# EAGLE board Ultrasonics (EAGLE 9.4.2)
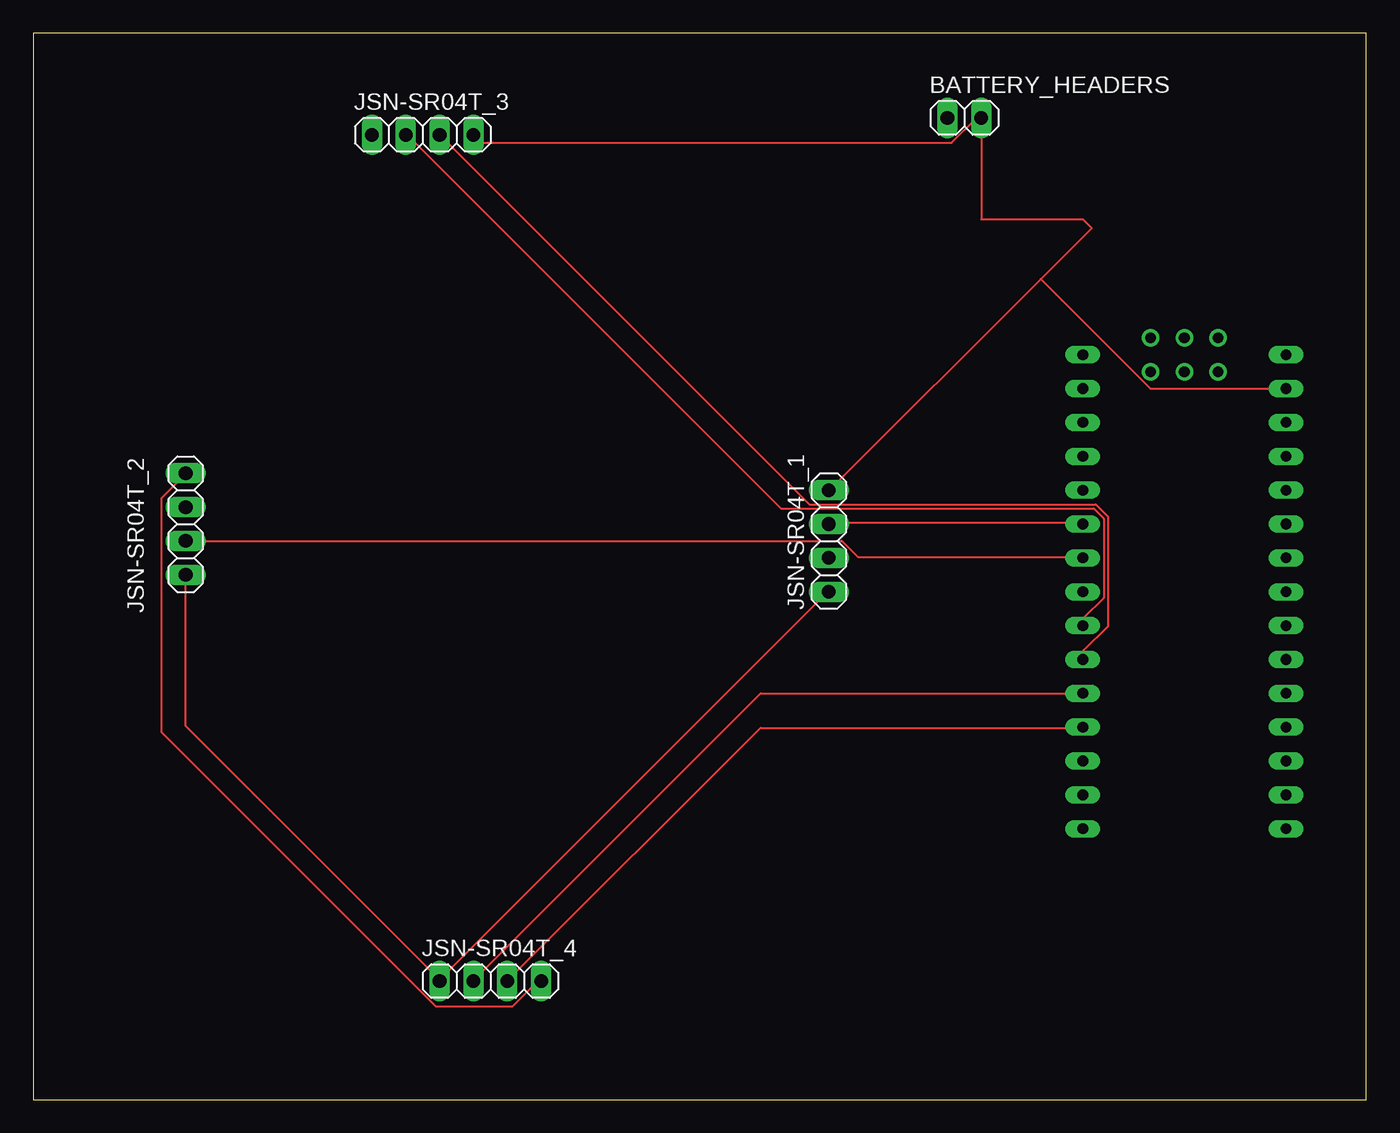
[diagram p0: board, top side]
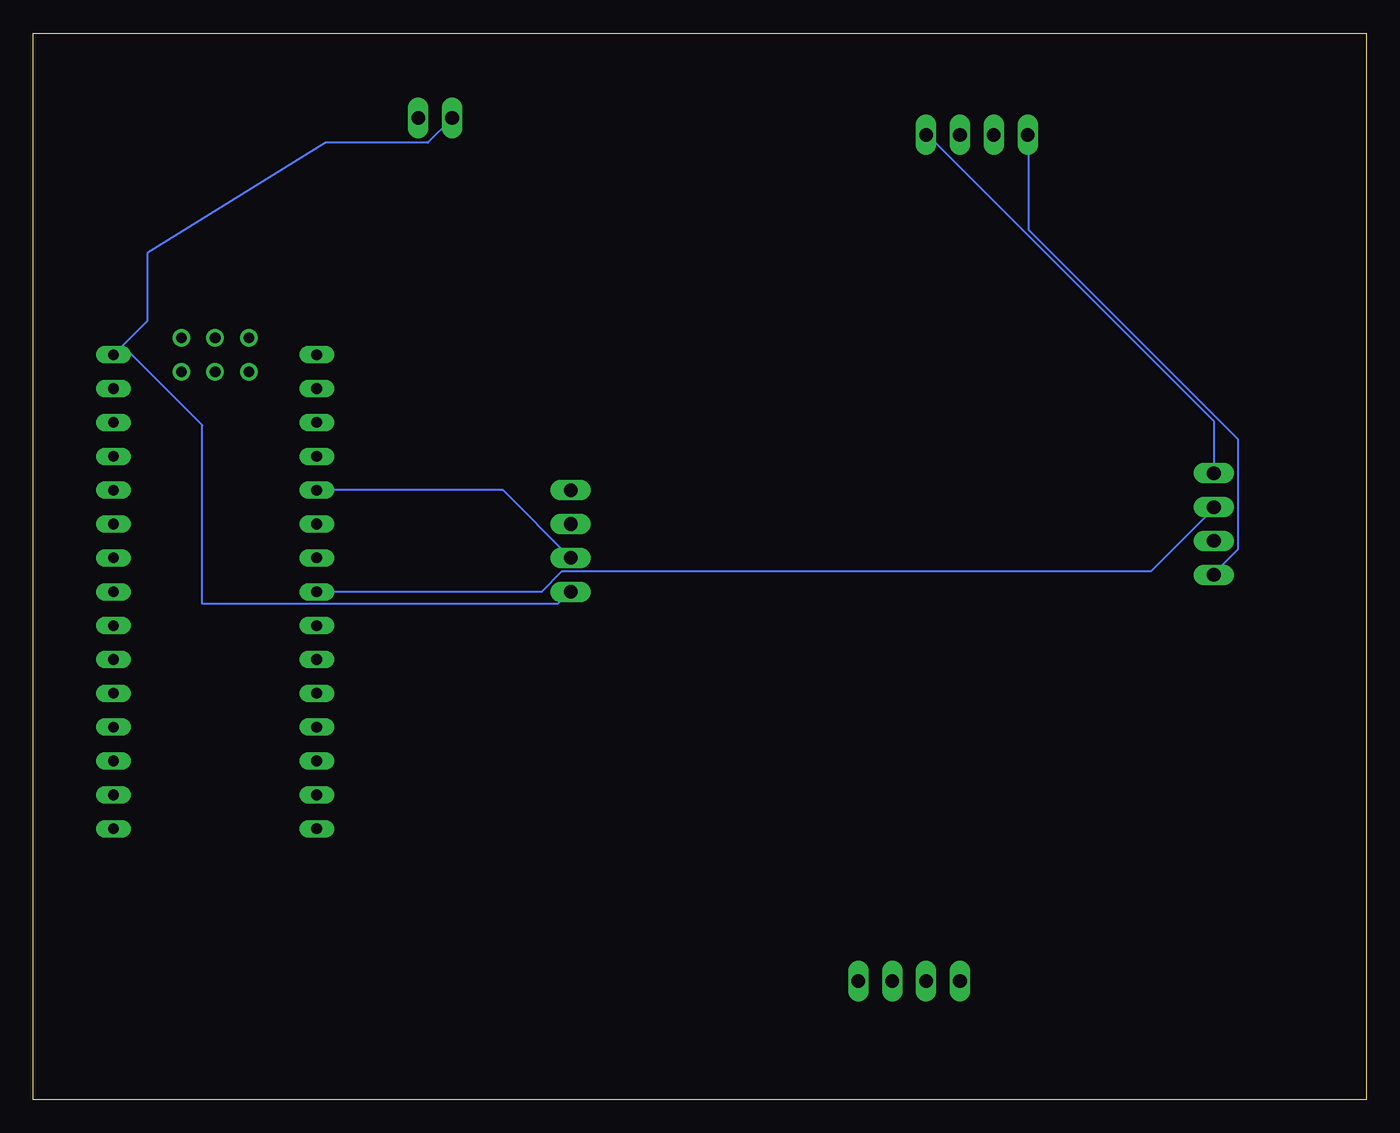
[diagram p1: board, bottom side, seen from below]

Size 100 x 80 mm. Coordinates in mm from the lower left corner, seen from the top.
Outline: 0,0 100,0 100,80 0,80 0,0
Copper layers (1*16): Top 0.035mm / dielectric 1.5mm / Bottom 0.035mm
Design rules "default": minimum track width 6mil, minimum drill 0.35mm, track to track 6mil, track to pad 6mil, pad to pad 6mil, via to via 6mil, smd to smd 6mil, copper to edge 40mil, drill to drill 6mil, minimum pad ring 10mil, minimum via ring 8mil, stop-mask expansion 4mil, vias tented up to drill 0mil, thermal gap 10mil

## Footprints (pad centres in the part's own frame; a part is rotated, then mirrored left to right if it is on the bottom)
1X02 = drill 1.016 long: 1 -1.27,0; 2 1.27,0
1X04 = drill 1.016 long: 1 -3.81,0; 2 -1.27,0; 3 1.27,0; 4 3.81,0
NANO = drill 0.8 long: 3.3V -10.16,24.13; 5V -10.16,-1.27; A0 -10.16,19.05; A1 -10.16,16.51; A2 -10.16,13.97; A3 -10.16,11.43; A4 -10.16,8.89; A5 -10.16,6.35; A6 -10.16,3.81; A7 -10.16,1.27; AREF -10.16,21.59; D2 5.08,1.27; D3 5.08,3.81; D4 5.08,6.35; D5 5.08,8.89; D6 5.08,11.43; D7 5.08,13.97; D8 5.08,16.51; D9 5.08,19.05; D10 5.08,21.59; D11 5.08,24.13; D12 5.08,26.67; D13 -10.16,26.67; GND -10.16,-6.35; GND1 5.08,-1.27; RAW -10.16,-8.89; RST -10.16,-3.81; RST1 5.08,-3.81; RX1 5.08,-6.35; TX0 5.08,-8.89 | drill 0.8: ICSP1 -5.08,-10.16; ICSP2 -5.08,-7.62; ICSP3 -2.54,-10.16; ICSP4 -2.54,-7.62; ICSP5 0,-10.16; ICSP6 0,-7.62

## Placement (x,y rotation side)
BATTERY_HEADERS  [1X02]  69.85,73.66 0 top
JSN-SR04T_1  [1X04]  59.69,41.91 90 top
JSN-SR04T_2  [1X04]  11.43,43.18 90 top
JSN-SR04T_3  [1X04]  29.21,72.39 0 top
JSN-SR04T_4  [1X04]  34.29,8.89 0 top
U$1  NANO  [NANO]  83.82,46.99 180 top

## Library data of the parts
BATTERY_HEADERS JSN-SR04T_1-JSN-SR04T_4 = pinhead
U$1 = Arduino-clone

## Nets
N$1: BATTERY_HEADERS.1 JSN-SR04T_1.1 JSN-SR04T_2.1 JSN-SR04T_3.1 JSN-SR04T_4.1 U$1.RAW
N$2: BATTERY_HEADERS.2 JSN-SR04T_1.4 JSN-SR04T_2.4 JSN-SR04T_3.4 JSN-SR04T_4.4 U$1.GND
N$3: JSN-SR04T_1.2 U$1.D2
N$4: JSN-SR04T_1.3 U$1.D3
N$5: JSN-SR04T_2.2 U$1.D4
N$6: JSN-SR04T_2.3 U$1.D5
N$7: JSN-SR04T_3.2 U$1.D6
N$8: JSN-SR04T_3.3 U$1.D7
N$9: JSN-SR04T_4.2 U$1.D8
N$10: JSN-SR04T_4.3 U$1.D9

## Tracks (layer width: path | path; a pad name or v marks a point on that pad's centre or on a via)
N$1
  Top 0.152: JSN-SR04T_2.1 11.43,28.04 30.48,8.99 | 30.48,8.99 59.59,38.1 JSN-SR04T_1.1 | 30.48,8.99 JSN-SR04T_4.1
  Bottom 0.152: 92.66,55.93 93.88,55.93 U$1.RAW | BATTERY_HEADERS.1 68.58,73.61 70.41,71.78 78.08,71.78 91.44,63.5 91.44,58.42 93.29,56.57 92.66,55.93 | JSN-SR04T_3.1 25.3,72.39 25.3,65.23 9.6,49.53 9.6,41.3 11.43,39.47 JSN-SR04T_2.1 | 92.66,55.93 87.33,50.6 87.33,37.19 60.66,37.19 59.74,38.1 JSN-SR04T_1.1
N$2
  Top 0.152: U$1.GND 83.82,53.34 75.59,61.57 | 75.59,61.57 79.4,65.38 78.74,66.04 71.12,66.04 BATTERY_HEADERS.2 71.02,73.61 70.71,73.61 68.89,71.78 33.68,71.78 33.07,72.39 JSN-SR04T_3.4 | 75.59,61.57 59.74,45.72 JSN-SR04T_1.4 | JSN-SR04T_4.4 38.1,8.84 37.8,8.84 35.97,7.01 30.18,7.01 9.6,27.58 9.6,45.11 11.43,46.94 JSN-SR04T_2.4
  Bottom 0.152: JSN-SR04T_2.4 11.43,50.9 32.92,72.39 JSN-SR04T_3.4
N$3
  Bottom 0.152: U$1.D2 64.77,45.72 JSN-SR04T_1.2
N$4
  Top 0.152: U$1.D3 78.64,43.28 59.74,43.28 JSN-SR04T_1.3
N$5
  Top 0.152: JSN-SR04T_2.2 60.66,41.91 61.87,40.69 78.64,40.69 U$1.D4
N$6
  Bottom 0.152: U$1.D5 61.87,38.1 60.35,39.62 16.15,39.62 11.43,44.35 JSN-SR04T_2.3
N$7
  Top 0.152: U$1.D6 78.79,35.66 78.79,36.12 80.31,37.64 80.31,43.59 79.55,44.35 56.08,44.35 28.04,72.39 JSN-SR04T_3.2
N$8
  Top 0.152: JSN-SR04T_3.3 58.22,44.65 79.7,44.65 80.62,43.74 80.62,35.51 78.79,33.68 78.79,33.07 U$1.D7
N$9
  Top 0.152: U$1.D8 54.56,30.48 33.07,8.99 JSN-SR04T_4.2
N$10
  Top 0.152: JSN-SR04T_4.3 54.56,27.89 78.64,27.89 U$1.D9